# Altium PCB pcb.PcbDoc
Units mm, origin at the board's own origin, x right, y up, seen from the top; angles counter-clockwise.
Board outline 40 x 109.98 mm, 4 copper layers (Top Layer, GND, PWR, Bottom Layer), stack 0.603 mm thick; 34 components, 28 nets, 121 pads, 4 vias.
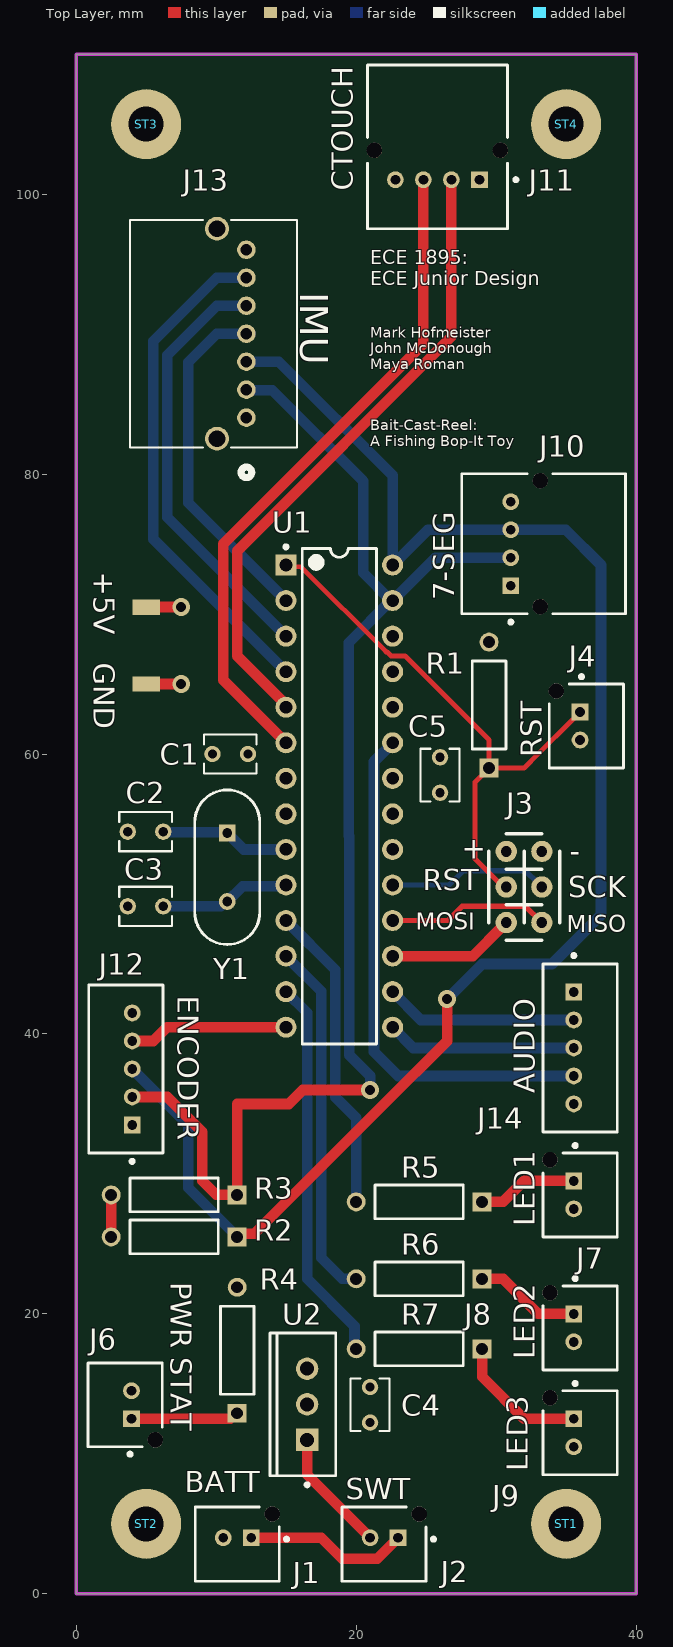
[diagram p0: Top Layer view]
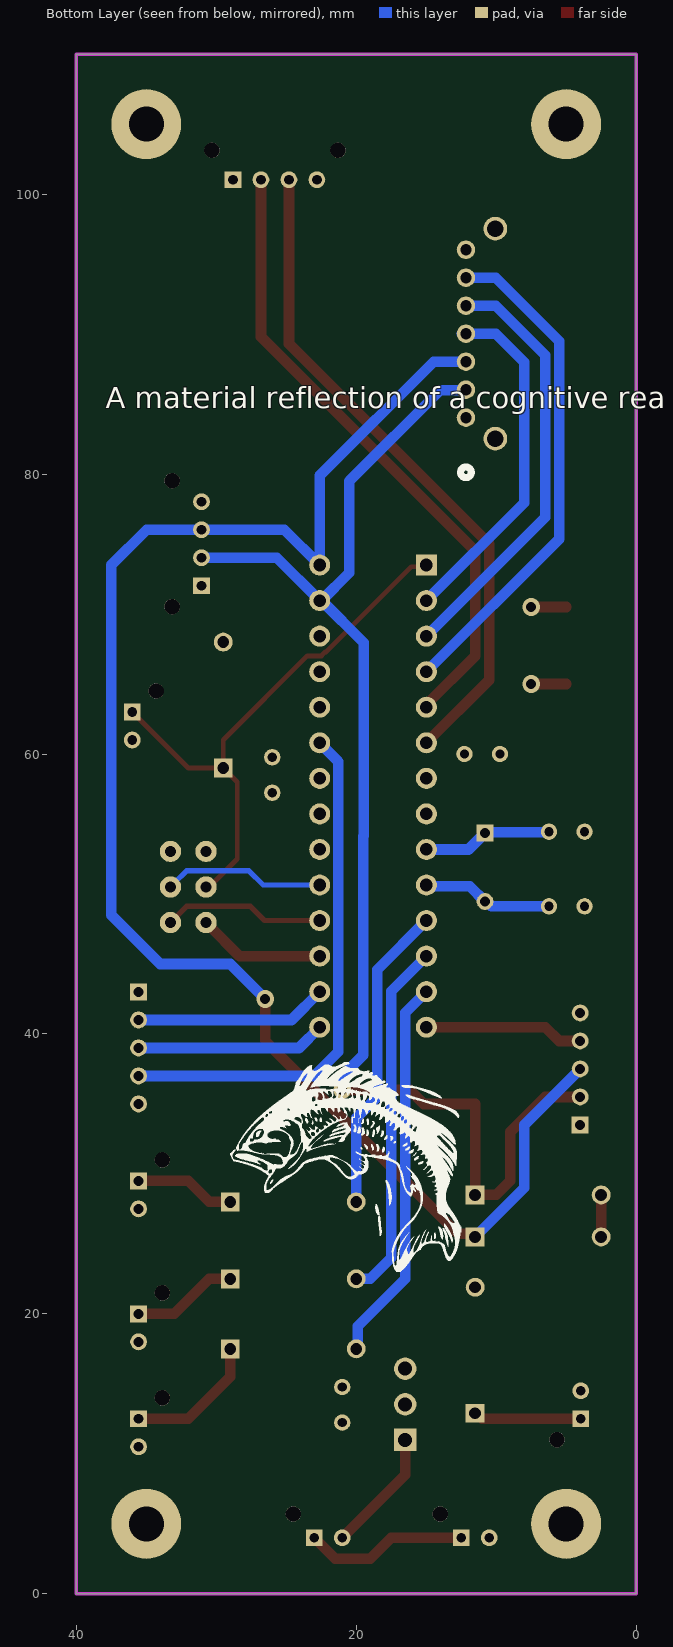
[diagram p1: Bottom Layer view, seen from below]
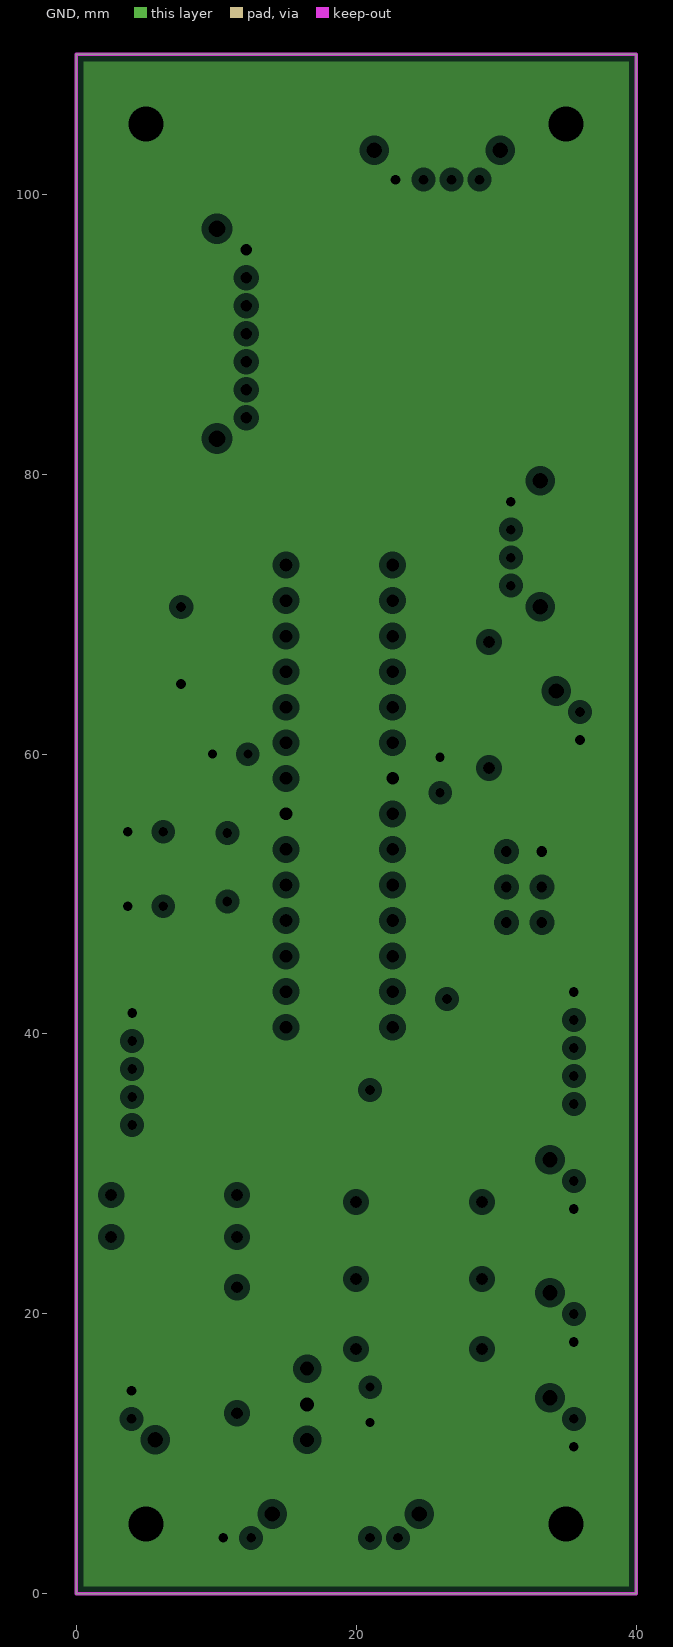
[diagram p2: GND, clearances drawn from the general rule]
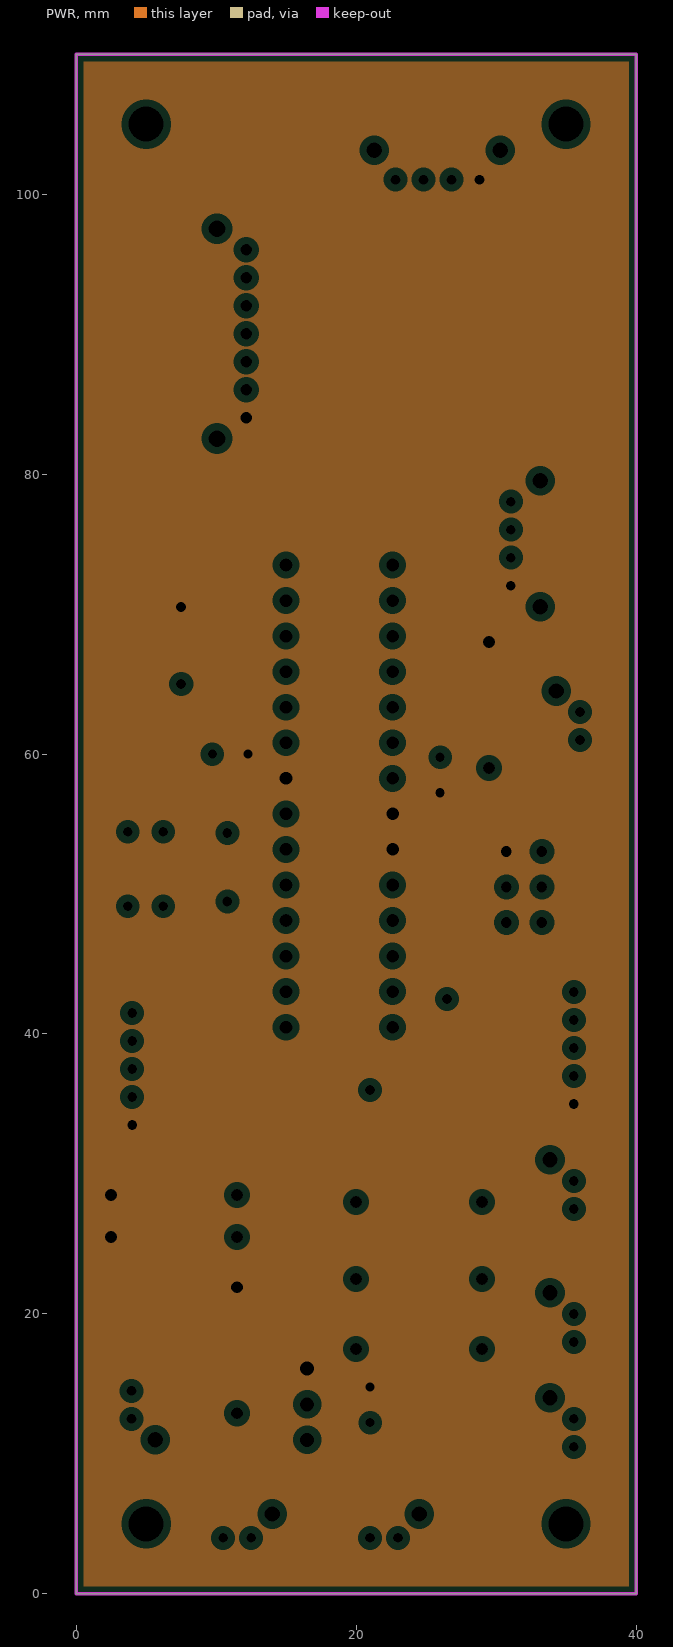
[diagram p3: PWR, clearances drawn from the general rule]
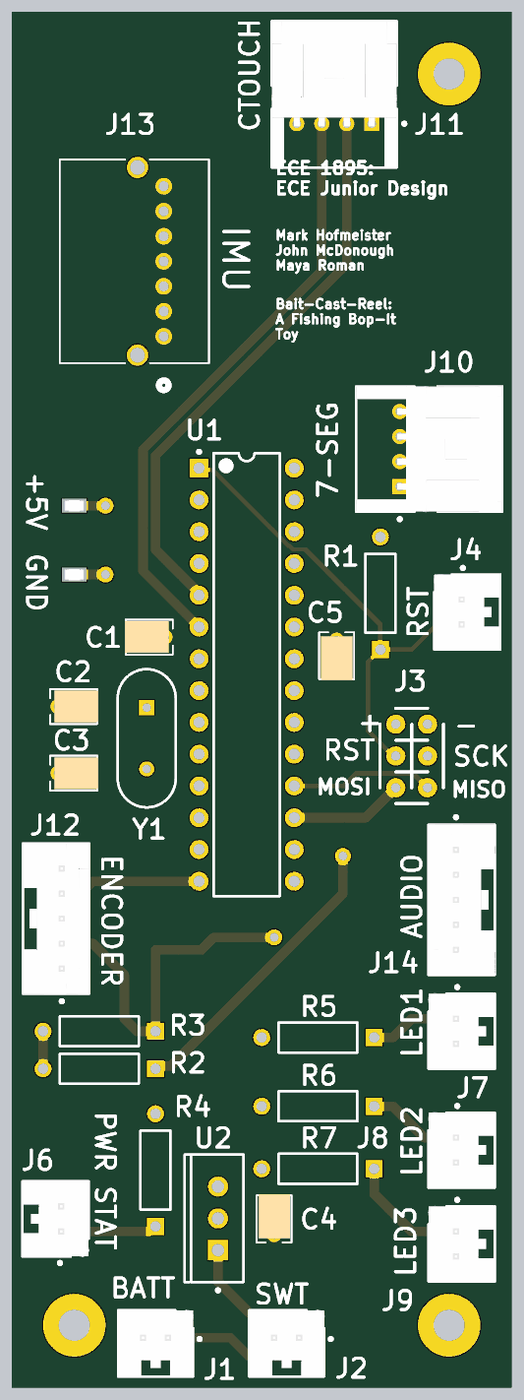
[diagram p4: 3D render of the assembled board from above, using the file's embedded part models]

## Layer stack, top to bottom
Top Solder: solder mask 0.0102, Solder Resist, Dk 3.5
Top Layer: signal copper 0.0356
Dielectric 2: prepreg 0.0711, PP-006, Dk 4.1
GND: plane copper 0.035, net GND
Dielectric 1: dielectric 0.32, FR-4, Dk 4.8
PWR: plane copper 0.035, net VCC
Dielectric 3: prepreg 0.0711, PP-006, Dk 4.1
Bottom Layer: signal copper 0.0356
Bottom Solder: solder mask 0.0102, Solder Resist, Dk 3.5

## Board outline
0,0 40.005,0 40.005,109.982 0,109.982

## Design rules (kind name [scope] priority, off if disabled: settings)
BoardOutlineClearance [All] p1: gap=0.2 ignorepadtopadclearanceinfootprint=FALSE except(0.4: Arc-SplitBarrior Arc-SplitContinuation Track-SplitBarrior Track-SplitContinuation SMDPad-SplitBarrior SMDPad-SplitContinuation THPad-SplitBarrior THPad-SplitContinuation Via-SplitBarrior Via-SplitContinuation Fill-SplitBarrior Fill-SplitContinuation Poly-SplitBarrior Poly-SplitContinuation Region-SplitBarrior Region-SplitContinuation Text-SplitBarrior Text-SplitContinuation)
Clearance "Clearance Bottom Layer" [OnLayer('Bottom Layer')] p1: gap=0.203 ignorepadtopadclearanceinfootprint=TRUE except(0.254: Arc-Text Track-Text SMDPad-Text THPad-Text Via-Text Fill-Text Poly-Text Region-Text Text-Text)
Clearance "Clearance Top Layer" [OnLayer('Top Layer')] p2: gap=0.203 ignorepadtopadclearanceinfootprint=TRUE except(0.254: Arc-Text Track-Text SMDPad-Text THPad-Text Via-Text Fill-Text Poly-Text Region-Text Text-Text)
Clearance [All] p3: gap=0.2 ignorepadtopadclearanceinfootprint=FALSE except(0.089: Arc-Arc Arc-Track Arc-SMDPad Track-Track Track-SMDPad SMDPad-SMDPad; 0.127: Arc-Via Track-Via SMDPad-Via THPad-Via Via-Via; 0.254: Arc-Text Track-Text SMDPad-Text THPad-Text Via-Text Fill-Text Poly-Text Region-Text Text-Text)
HoleSize [All] p1: absolutevalues=TRUE maxlimit=6.3 minlimit=0.2 maxpercent=80.000 minpercent=20.000
MinimumAnnularRing [All] p1: minimumring=0.076
MinimumSolderMaskSliver [All] p1: minsoldermaskwidth=0.1
PlaneClearance [All] p1: clearance=0.508
PlaneConnect [All] p1: planeconnectstyle=Relief reliefexpansion=0.508 reliefentries=4 reliefconductorwidth=0.254 reliefairgap=0.254
PolygonConnect PolygonConnect_1 [All] p1: thpad.connectstyle=Relief thpad.reliefconductorwidth=0.508 thpad.reliefentries=4 thpad.polygonreliefangle="90 Angle" thpad.airgapwidth=0.254 smdpad.connectstyle=Relief smdpad.reliefconductorwidth=0.508 smdpad.reliefentries=4 smdpad.polygonreliefangle="90 Angle" smdpad.airgapwidth=0.254 via.connectstyle=Direct via.reliefconductorwidth=0.508 via.reliefentries=4 via.polygonreliefangle="90 Angle" via.airgapwidth=0.254
RoutingCorners [All] p1: cornerstyle=Round minsetback=2.54 maxsetback=2.54
RoutingVias [All] p1: holewidth=0.5 width=1 viastyle="Through Hole" minholewidth=0.2 minwidth=0.45 maxholewidth=1 maxwidth=2
SilkToSilkClearance [All] p1: silktosilkclearance=0.1
SilkToSolderMaskClearance [IsPad] p1: minsilkscreentomaskgap=0.1 clearancetoexposedcopper=TRUE
SolderMaskExpansion [All] p1: expansion=0.102 istentingtop=FALSE
Width [All] p1: maxlimit=2.54 minlimit=0.089 preferedwidth=0.381
23 further rules are at their usual default settings.

## Classes and differential pairs
component class peripherals: J4 J6 J7 J8 J9 J10 J11 J12 J13 J14 R4 R5 R6 R7
component class ATMEGA328P: +5V C1 C2 C3 C4 C5 GND J1 J2 J3 R1 R2 R3 ST1 ST2 ST3 ST4 U1 U2 Y1

## Components (designator, comment, footprint, x,y, rotation, side; value= is the part's Value field where it differs from the comment)
+5V "RCU-0C" TP+195X110 5,70.5 r0 top
C1 "Cap, 22pF, ceramic, TH" "New footprint 1" 11,60 r0 top
C2 "Cap, 22pF, ceramic, TH" "New footprint 1" 4.953,54.452 r180 top
C3 "Cap, 22pF, ceramic, TH" "New footprint 1" 4.953,49.118 r180 top
C4 "Cap, 22pF, ceramic, TH" "New footprint 1" 21,13.5 r270 top
C5 "Cap, 22pF, ceramic, TH" "New footprint 1" 26,58.5 r90 top
GND "RCU-0C" TP+195X110 5,65 r180 top
J1 "B02B-PASK-1(LF)(SN)" FP-B02B-PASK-1_LF_SN-MFG 11.5,3.55 r0 top
J2 "B02B-PASK-1(LF)(SN)" FP-B02B-PASK-1_LF_SN-MFG 22,3.55 r0 top
J3 "929836-01-03-RK" 929836-01-03-RK-Footprint-1 32,50.5 r270 top
J4 "B02B-PASK-1(LF)(SN)" FP-B02B-PASK-1_LF_SN-MFG 36.45,62 r90 top
J6 "B02B-PASK-1(LF)(SN)" FP-B02B-PASK-1_LF_SN-MFG 3.5,13.5 r270 top
J7 "B02B-PASK-1(LF)(SN)" FP-B02B-PASK-1_LF_SN-MFG 36,28.5 r90 top
J8 "B02B-PASK-1(LF)(SN)" FP-B02B-PASK-1_LF_SN-MFG 36,19 r90 top
J9 "B02B-PASK-1(LF)(SN)" FP-B02B-PASK-1_LF_SN-MFG 36,11.5 r90 top
J10 "S04B-PASK-2(LF)(SN)" FP-S04B-PASK-2_LF_SN-MFG 33.401,75.026 r270 top
J11 "S04B-PASK-2(LF)(SN)" FP-S04B-PASK-2_LF_SN-MFG 25.807,103.381 r0 top
J12 "B05B-PASK(LF)(SN)" FP-B05B-PASK_LF_SN-MFG 3.55,37.5 r270 top
J13 "S07B-PASK-2(LF)(SN)" S07B-PASK-2(LF)(SN)-Footprint-1 10,90 r90 top
J14 "B05B-PASK(LF)(SN)" FP-B05B-PASK_LF_SN-MFG 36,39 r90 top
R1 "1k Through-Hole 1/4W" RESA60-630X240 29.5,63.5 r90 top
R2 "1k Through-Hole 1/4W" RESA60-630X240 7,25.5 r180 top
R3 "1k Through-Hole 1/4W" RESA60-630X240 7,28.5 r180 top
R4 "1k Through-Hole 1/4W" RESA60-630X240 11.5,17.4 r90 top
R5 "1k Through-Hole 1/4W" RESA60-630X240 24.5,28 r180 top
R6 "1k Through-Hole 1/4W" RESA60-630X240 24.5,22.5 r180 top
R7 "1k Through-Hole 1/4W" RESA60-630X240 24.5,17.5 r180 top
ST1 "PTH-M2D5X5" PTH-M2D5X5#1 35.052,4.699 r0 top
ST2 "PTH-M2D5X5" PTH-M2D5X5#2 5,5 r0 top
ST3 "PTH-M2D5X5" PTH-M2D5X5#3 76.896,-11.682 r0 top
ST4 "PTH-M2D5X5" PTH-M2D5X5#4 35.814,67.31 r0 top
U1 "ATmega328P-PU" 28P3 18.796,56.992 r0 top
U2 "LM7805CT" FAIR-TO-220-3 16.5,13.54 r180 top
Y1 "HC-49US 16.000MHZ" JPY-HC-49US 10.795,51.912 r270 top

## Footprints (in the part's own frame and the unit in brackets; to place one, negate y for a bottom-side part, rotate by r counter-clockwise, add the part's x,y. Pads: shape width x height; smd on the part's side, far side on the other; paste and mask are expansions set on the pad)
28P3 [mm] "28-Pin Plastic Dual In-Line Package (PDIP)"
  rect 1.5x1.5 hole 0.9: 1(-3.81,16.51)
  round 1.5 hole 0.9: 2(-3.81,13.97) 3(-3.81,11.43) 4(-3.81,8.89) 5(-3.81,6.35) 6(-3.81,3.81) 7(-3.81,1.27) 8(-3.81,-1.27) 9(-3.81,-3.81) 10(-3.81,-6.35) 11(-3.81,-8.89) 12(-3.81,-11.43) 13(-3.81,-13.97) 14(-3.81,-16.51) 15(3.81,-16.51) 16(3.81,-13.97) 17(3.81,-11.43) 18(3.81,-8.89) 19(3.81,-6.35) 20(3.81,-3.81) 21(3.81,-1.27) 22(3.81,1.27) 23(3.81,3.81) 24(3.81,6.35) 25(3.81,8.89) 26(3.81,11.43) 27(3.81,13.97) 28(3.81,16.51)
  silkscreen extent -3.93,-17.7 2.65,17.93, body extent -3.6,-17.65 3.6,17.65, height 4.58
929836-01-03-RK-Footprint-1 [mil]
  round 60 hole 30: 1(-100,-50) 2(0,-50) 3(100,-50) 4(100,50) 5(0,50) 6(-100,50)
  silkscreen extent -150,-100 150,100
FAIR-TO-220-3 [mm] "FM, 3-Leads, Body 10.2x4.7mm, Pitch 2.54mm"
  rect 1.6x1.6 hole 1: 1(0,2.54)
  round 1.6 hole 1: 2(0,0) 3(0,-2.54)
  silkscreen extent -2.04,-5.1 2.66,5.87, body extent -2.04,-5.1 2.66,5.1, height 18.95
FP-B02B-PASK-1_LF_SN-MFG [mm]
  rect 1.2x1.2 hole 0.7 paste-1000 mask+0: 1(1,0.45)
  round 1.2 hole 0.7 paste-1000 mask+0: 2(-1,0.45)
  round 1.1 hole 1.1 unplated paste-1000 mask+0: ""(2.5,2.15)
  silkscreen extent -3,-2.65 3.65,2.65, body extent -3.1,-2.75 3.15,2.8, height 0.25
FP-B05B-PASK_LF_SN-MFG [mm]
  rect 1.2x1.2 hole 0.7 paste-1000 mask+0: 1(4,0.45)
  round 1.2 hole 0.7 paste-1000 mask+0: 2(2,0.45) 3(0,0.45) 4(-2,0.45) 5(-4,0.45)
  silkscreen extent -6,-2.65 6.72,2.65, body extent -6.1,-2.75 6.1,2.75, height 0.25
FP-S04B-PASK-2_LF_SN-MFG [mm]
  rect 1.2x1.2 hole 0.7 paste-1000 mask+0: 1(3,-2.35)
  round 1.2 hole 0.7 paste-1000 mask+0: 2(1,-2.35) 3(-1,-2.35) 4(-3,-2.35)
  round 1.1 hole 1.1 unplated paste-1000 mask+0: ""(-4.5,-0.25) ""(4.5,-0.25)
  silkscreen extent -5,-5.85 5.72,5.85, body extent -5.15,-5.95 5.15,5.95, height 0.25
JPY-HC-49US [mm] "THD, 2-Leads, Body 11.05x4.65mm, Pitch 4.9mm"
  rect 1.2x1.2 hole 0.7: 1(-2.45,0)
  round 1.2 hole 0.7: 2(2.45,0)
  silkscreen extent -5.53,-2.32 5.53,2.32, body extent -5.53,-2.33 5.52,2.32, height 3.5
"New footprint 1" [mil]
  round 46 hole 26 mask+0: 1(-50,0) 2(50,0)
  silkscreen extent -74,-55 74,55, body extent -77,-50 61,50, height 120
PTH-M2D5X5#1 [mm]
  round 5 hole 2.5: 1(-0.052,0.301)
PTH-M2D5X5#2 [mm]
  round 5 hole 2.5: 1(0,0)
PTH-M2D5X5#3 [mm]
  round 5 hole 2.5: 1(-71.896,116.682)
PTH-M2D5X5#4 [mm]
  round 5 hole 2.5: 1(-0.814,37.69)
RESA60-630X240 [mm] "Axial Resistor, 2-Leads, Dia 2.4mm, Body Length 6.3mm"
  rect 1.35x1.35 hole 0.85: 1(-4.5,0)
  round 1.35 hole 0.85: 2(4.5,0)
  silkscreen extent -3.15,-1.2 3.15,1.2, body extent -3.15,-1.2 3.15,1.2, height 2.4
S07B-PASK-2(LF)(SN)-Footprint-1 [mil]
  round 52 hole 32 mask+0: 1(-235,-85) 2(-156.26,-85) 3(-77.52,-85) 4(1.22,-85) 5(79.96,-85) 6(158.7,-85) 7(237.44,-85)
  round 67 hole 47: 8(-294.06,-2.32) 9(296.5,-2.32)
  silkscreen extent -404,-228 321,243, body extent -235,-85 -225,-75, height 10
TP+195X110 [mm]
  rect 1.95x1.1 smd: 1(0,0)
  body extent -0.8,-0.45 0.8,0.45, height 1.3

## Part data
+5V GND: "Natural PC Test Point - - Plating Surface Mount Mounting Type", Package=None, Availability="In Stock", Check_prices=https://www.snapeda.com/parts/RCU-0C/TE+Connectivity/view-part/?ref=eda, MF="TE Connectivity AMP Connectors", MP=RCU-0C, Price=None, Purchase-URL=https://pricing.snapeda.com/search/part/RCU-0C/?ref=eda, SnapEDA_Link=https://www.snapeda.com/parts/RCU-0C/TE+Connectivity/view-part/?ref=snap
C1 C2 C3 C4 C5: library part CMP-001-00113-1
J1 J2 J4 J6 J7 J8 J9: library part CMP-17439-000415-1, "CONN HEADER VERT 2POS 2MM", Color=Natural, Current Rating=3A, Flammability Rating="UL94 V-0", Housing Color=White, Insulation Resistance=1GR, Max Operating Temperature=85°C, Min Operating Temperature=-25°C, Voltage Rating=250V, Connector Type=Header, Contact Finish - Mating=TIN, Contact Material="Copper Alloy", Contact Mating Length=0.126inch, Contact Plating=Tin, Contact Shape=Square, Contact Type="Male Pin", Fastening Type=Ramp, Gender=Male, Insulation Color=Natural, Insulation Material=PBT, Lead Free="Lead Free", Mated Stacking Heights=14.9mm, Material=Polybutylene, Mount="Through Hole", Number of Contacts=2, Number of Positions=2, Number of Rows=1, Orientation=Straight, Packaging=Bulk, Pitch=2mm, Series=PA, Termination=Solder
J3: library part CMP-002-00092-3, "3x2 male header"
J10 J11: library part CMP-17439-000283-1, "CONN HEADER R/A 4POS 2MM", Color=Natural, Contact Resistance=20mR, Current Rating=3A, Flammability Rating="UL94 V-0", Housing Color=White, Max Operating Temperature=85°C, Max Voltage Rating (AC)=250V, Min Operating Temperature=-25°C, Connector Type=Header, Contact Finish - Mating=TIN, Contact Material="Copper Alloy", Contact Mating Length=0.126inch, Contact Plating=Copper, Contact Shape=Square, Contact Type="Male Pin", Depth=11.7mm, Fastening Type=Ramp, Insulation Color=Natural, Insulation Material=PBT, Lead Free="Lead Free", Length=10mm, Max Current Rating=3A, Mount="Through Hole", Number of Contacts=4, Number of Positions=4, Number of Rows=1, Orientation="Right Angle", Packaging=Bulk, Pitch=2mm, Series=PA, Termination=Solder, Voltage Rating=250V
J12 J14: library part CMP-17439-000143-1, "CONN HEADER VERT 5POS 2MM", Color=Natural, Flammability Rating="UL94 V-0", Housing Color=White, Voltage Rating=250V, Connector Type=Header, Contact Finish - Mating=TIN, Contact Material="Copper Alloy", Contact Mating Length=0.126inch, Contact Plating=Tin, Contact Shape=Square, Contact Type="Male Pin", Fastening Type=Ramp, Gender=Male, Insulation Color=Natural, Insulation Material=PBT, Lead Free="Lead Free", Mated Stacking Heights=14.9mm, Mount="Through Hole", Number of Contacts=5, Number of Positions=5, Number of Rows=1, Packaging=Bulk, Pitch=2mm, Series=PA, Termination="Kinked Pin"
J13: library part CMP-002-00091-1, "Conn Shrouded Header HDR 7 POS 2mm Solder RA Thru-Hole Box"
R1 R2 R3 R4 R5 R6 R7: library part CMP-009-00195-1, "RES 1K OHM 1/4W 1% AXIAL", Case/Package=Axial, Max Operating Temperature=155°C, Max Power Dissipation=250mW, Min Operating Temperature=-55°C, Package Quantity=200, Resistance=1kR, Resistor Type="Metal Film", Temperature Coefficient=100ppm/°C, Tolerance=1%, Voltage Rating=250V, Voltage Rating (DC)=200V, Lead Diameter=0.6mm, Lead Free="Lead Free", Length=0.248inch, Mount="Through Hole", Number of Terminations=2, Packaging=Bulk, Power Rating=250mW, RoHS Compliant=Yes, Series=MFR, Termination=Axial, Width=6.3mm
ST1 ST2 ST3 ST4: library part CMP-00028-00004-2, "M2 PTH (2.5mm), 5mm pad", Pins=1
U1: library part CMP-0095-00013-2, "8-bit AVR Microcontroller, 32KB Flash, 1KB EEPROM, 2KB SRAM, 28-pin PDIP, Industrial Grade (-40°C to 85°C)", ComponentLink1Description="Manufacturer URL", ComponentLink1URL=http://www.atmel.com/, ComponentLink2Description="ATmega48A/48PA/88A/88PA/168A/168PA/328/328P Datasheet", ComponentLink2URL=http://www.atmel.com/dyn/resources/prod_documents/8271.pdf, ComponentLink3Description="ATmega48A/48PA/88A/88PA/168A/168PA/328/328P Summary", ComponentLink3URL=http://www.atmel.com/dyn/resources/prod_documents/8271S.pdf, DatasheetVersion="revD, May-2011", PackageDescription="28-lead (0.300\"/7.62mm Wide) Plastic Dual Inline Package (PDIP)", PackageReference=28P3, PackageVersion="revB, Sep-2001", RevisionNote="DatasheetVersion updated. URLs added."
U2: library part CMP-2000-04938-1, "Positive Voltage Regulator, 5 V, 1 A, -40 to 125 degC, 3-Pin TO-220, RoHS, Tube", Manufacturer=FairchildSemiconductor, Maximum Input Voltage=35V, Maximum Output Current=2.2(Typ)A, Maximum Quiescent Current=8mA, Operating Temperature=-40to125degC, Output Voltage=5V, Package=3TO-220AB, Package Description="3-Pin Through Hole Device, Body 10 x 4.5 mm, Pitch 2.54 mm", Package Reference=TO-220, Typical Dropout Voltage @ Current=2@1AV, Accuracy=±4%, Category=LinearRegulator, Datasheet URL=https://datasheet.ciiva.com/26904/lm7805ct-26904988.pdf, Datasheet Version=Aug-12, Line Regulation=100mV, Load Regulation=100mV, Manufacturer URL=https://www.fairchildsemi.com/, Mounting=ThroughHole, Number of Outputs=1, Output Type=Fixed, Package URL=https://www.fairchildsemi.com/package-drawings/TO/TO220B03.pdf, Packaging=Rail/Tube, Polarity=Positive, Rad Hard=No, Type=Linear
Y1: library part CMP-003-00005-1, "Crystal, 16 MHz, +/- 30 ppm, 18 pF, -20 to 70 degC, 2-Pin THD", Case/Package=HC-49US, Frequency=16MHz, Manufacturer="Jing peng yuan", Package Description="2-Pin Throug Hole Device, Body 11.05 x 4.65 mm, Pitch 4.9 mm", Datasheet URL=https://statics3.seeedstudio.com/images/opl/datasheet/306010014.pdf, Datasheet Version=May-15, Mounting Technology=TH, Package Reference=HC-49US, RoHS Compliant=Unknown

## Via types
v1: diameter 1.27, hole 0.711, Top Layer to Bottom Layer, 4 vias

## Nets (pads, with @x,y where several pads share a name; then routed paths per layer and width w, separated by ;. In a path a pad name is that pad's centre, name@x,y a point inside that pad or via, vN(x,y) a via of type N, cw(c..) or ccw(c..) an arc to the next point about the centre after c; other vN are vias at no path point)
AUDIO_1: J14.3 U1.15 | length 13.5
  Bottom Layer w0.762: U1.15 24.088,39 J14.3@35.5,39
AUDIO_2: J14.2 U1.16 | length 13.7
  Bottom Layer w0.762: U1.16 24.628,41 J14.2@35.5,41
CAP_IN: J11.2 U1.5 | length 45.5
  Top Layer w0.762: U1.5 14.986,63.514 11.5,67 11.5,74.5 26.807,89.807 J11.2
CAP_OUT: J11.3 U1.6 | length 48.2
  Top Layer w0.762: U1.6 10.5,65.288 10.5,75 24.807,89.307 J11.3
  Bottom Layer w0.762: U1.6@14.848,60.94 U1.6
ENCODER_INT: J12.4 U1.14 | length 11.4
  Top Layer w0.762: J12.4 5.5,39.5 6.482,40.482 U1.14
  Bottom Layer w0.762: U1.14@14.955,40.482 U1.14
GND: C1.1 C2.2 C3.2 C4.2 C5.2 GND.1 J1.2 J3.6 J4.2 J6.2 J7.2 J8.2 J9.2 J10.4 J11.4 J12.5 J13.7 J14.1 ST1.1 ST2.1 ST3.1 ST4.1 U1.8 U1.22 U2.2 | length 2.5
  Top Layer w0.762: GND.1 v1(7.5,65)
IMU_ADR: J13.4 U1.2 | length 25.4
  Bottom Layer w0.762: J13.4@12.469,90.031 J13.4 10.031,90.031 8,88 8,77.948 U1.2 U1.2@15.186,70.962
IMU_INT_1: J13.5 U1.3 | length 30.8
  Top Layer w0.762: U1.3@14.908,68.5 U1.3
  Bottom Layer w0.762: J13.5 10.031,92.031 6.5,88.5 6.5,76.908 U1.3
IMU_INT_2: J13.6 U1.4 | length 36.2
  Top Layer w0.762: U1.4 U1.4@14.986,65.986
  Bottom Layer w0.762: J13.6 10.031,94.031 5.5,89.5 5.5,75.368 U1.4
LED_1: R5.2 U1.11 | length 22.2
  Bottom Layer w0.762: U1.11 18.5,44.588 18.5,35.5 20,34 R5.2
LED_2: R6.2 U1.12 | length 25.7
  Bottom Layer w0.762: U1.12 17.5,43.048 17.5,24 19,22.5 R6.2
LED_3: R7.2 U1.13 | length 27.6
  Bottom Layer w0.762: U1.13 16.5,41.508 16.5,22.5 19.887,19.113 19.887,17.613 R7.2
MISO: J3.4 U1.18 | length 11.8
  Top Layer w0.381: U1.18 26.552,48.102 27.566,49.116 32.114,49.116 33.23,48 J3.4@33.5,48
MOSI: J3.3 U1.17 | length 9.1
  Top Layer w0.762: U1.17@22.657,45.511 U1.17 28.332,45.562 30.5,47.73 J3.3@30.5,48
NetC2_1: C2.1 U1.9 Y1.1 | length 9.4
  Bottom Layer w0.762: C2.1 6.268,54.407 10.75,54.407 Y1.1 11.975,53.182 U1.9 U1.9@14.904,53.264
NetC3_1: C3.1 U1.10 Y1.2 | length 9.4
  Bottom Layer w0.762: C3.1 10.332,49.118 10.676,49.462 Y1.2 11.89,50.557 14.901,50.557 U1.10
NetJ1_1: J1.1 J2.1 | length 11.7
  Top Layer w0.762: J1.1 17.5,4 19,2.5 21.5,2.5 J2.1
NetJ2_2: J2.2 U2.1 | length 8.9
  Top Layer w0.762: U2.1 16.5,8.5 J2.2
NetJ6_1: J6.1 R4.1 | length 7.8
  Top Layer w0.762: J6.1 11,12.5 R4.1@11.5,13
NetJ7_1: J7.1 R5.1 | length 7.2
  Top Layer w0.762: R5.1 30.5,28 32,29.5 J7.1
NetJ8_1: J8.1 R6.1 | length 7.6
  Top Layer w0.762: R6.1 30.5,22.5 33,20 J8.1
NetJ9_1: J9.1 R7.1 | length 9.7
  Top Layer w0.762: R7.1 29,15.5 32,12.5 J9.1@35.5,12.5
RST: J3.2 J4.1 R1.1 U1.1 | length 39.7
  Top Layer w0.35: U1.1 15.111,73.377 16.056,73.377 22.139,67.294 22.206,67.294 22.49,67.01 23.49,67.01 29.5,61 R1.1 ; J3.2@30.5,50.5 28.5,52.5 28.5,58 R1.1 ; 32.446,59.446 J4.1 ; 32.5,59.5 32,59 R1.1
SCK: J3.5 U1.19 | length 11.5
  Bottom Layer w0.381: U1.19 26.642,50.642 27.656,51.656 32.114,51.656 33,50.77 J3.5@33,50.5
SCL: J10.3 J12.3 J13.3 R2.1 U1.28 | length 114.6
  Top Layer w0.762: R2.1 11.721,25.721 12.721,25.721 21.903,34.903 26.5,39.5 v1(26.5,42.5)
  Bottom Layer w0.762: J12.3 8,33.5 8,29 R2.1 ; J13.3 14.469,88.031 22.606,79.894 U1.28 25.13,76.026 J10.3 34.974,76.026 37.5,73.5 37.5,48.5 34,45 29,45 v1(26.5,42.5)
SDA: J10.2 J12.2 J13.2 R3.1 U1.27 | length 96.1
  Top Layer w0.762: J12.2 6.5,35.5 9,33 9,29.5 10,28.5 R3.1 11.5,35 15.181,35 16.181,36 v1(21,36) ; J13.2@12.052,85.924 J13.2
  Bottom Layer w0.762: J13.2 12.19,86 14,86 20.5,79.5 20.5,72.946 U1.27@22.484,70.962 ; v1(21,36) 21,37 19.5,38.5 19.5,54.122 19.465,54.157 19.465,67.943 U1.27@22.484,70.962 ; J10.2 25.67,74.026 U1.27 U1.27@22.484,70.962
SHUTDOWN: J14.4 U1.23 | length 37.6
  Bottom Layer w0.762: U1.23 22.606,60.793 21.272,59.459 21.272,38.728 23,37 J14.4@35.5,37
VCC: +5V.1 C1.2 C4.1 C5.1 J3.1 J10.1 J11.1 J12.1 J13.1 J14.5 R1.2 R2.2 R3.2 R4.2 U1.7 U1.20 U1.21 U2.3 | length 5.5
  Top Layer w0.762: R2.2 R3.2 ; +5V.1 v1(7.5,70.5)
pads on no net: J1. J2. J4. J6. J7. J8. J9. J10. J11. J13.8 J13.9 U1.24 U1.25 U1.26

## Polygon pours and split planes (outlines as drawn)
GND on GND (split plane): 39.495,0.51 0.51,0.51 0.51,109.472 39.495,109.472
VCC on PWR (split plane): 39.495,0.51 0.51,0.51 0.51,109.472 39.495,109.472

## Keep-outs
Keep-Out Layer:
  lines w0.254: 0,0 40,0 40,110 39.8,110 0,110 0,0

## Silkscreen, mask and mechanical layers (free items; w line width, h text height)
Top Overlay:
  text "CTOUCH" at 19.746,100.254 h1.52 r90
  text "ECE 1895:  / ECE Junior Design" at 21,93.5 h1
  text "IMU" at 16,93 h2 r270
  text "Mark Hofmeister / John McDonough / Maya Roman" at 21,87.5 h0.75
  text "Bait-Cast-Reel: / A Fishing Bop-It Toy" at 21,82 h0.75
  text "7-SEG" at 27,71 h1.52 r90
  text "RST" at 33.246,59.754 h1.52 r90
  text "+" at 27.554,52.5 h1.52
  text "-" at 35.254,52.292 h1.52
  text "RST" at 24.754,50.254 h1.52
  text "SCK" at 35.154,49.754 h1.52
  text "MOSI" at 24.254,47.454 h1.2
  text "MISO" at 35.054,47.254 h1.2
  text "ENCODER" at 7.254,42.746 h1.52 r270
  text "AUDIO" at 32.746,35.754 h1.52 r90
  text "LED1" at 32.746,26.254 h1.52 r90
  text "PWR STAT" at 6.754,22.246 h1.52 r270
  text "LED2" at 32.746,16.754 h1.52 r90
  text "LED3" at 32.246,8.754 h1.52 r90
  text "BATT" at 7.754,7.254 h1.52
  text "SWT" at 19.254,6.754 h1.52
Bottom Overlay:
  drawing of 39 lines, arcs and shapes, not listed
  text "A material reflection of a cognitive reality" at 37.9,84.7 h1.52